# EAGLE board tutorial2 (EAGLE 7.6.0)

Size 73.58 x 63.39 mm. Coordinates in mm from the lower left corner, seen from the top.
Outline: 0,0 56.82,0 56.82,53.33 0,53.33 0,0
Copper layers (1*16): Top 0.035mm / dielectric 1.5mm / Bottom 0.035mm
Design rules "default": minimum track width 10mil, minimum drill 24mil, track to track 8mil, track to pad 8mil, pad to pad 8mil, via to via 8mil, smd to smd 8mil, copper to edge 40mil, drill to drill 8mil, minimum pad ring 10mil, minimum via ring 8mil, stop-mask expansion 4mil, vias tented up to drill 0mil, thermal gap 10mil

## Footprints (pad centres in the part's own frame; a part is rotated, then mirrored left to right if it is on the bottom)
HDSP-M = drill 0.813 long: 1 -5.08,-7.62; 2 -2.54,-7.62; 3 0,-7.62; 4 2.54,-7.62; 5 5.08,-7.62; 6 5.08,7.62; 7 2.54,7.62; 8 0,7.62; 9 -2.54,7.62; 10 -5.08,7.62
0207/10 = drill 0.813 octagon: 1 -5.08,0; 2 5.08,0
B25V = drill 0.813 long: A 2.54,0.635; E -2.54,0.635; S 0,0.635
TL1105 = drill 1 pad 1.676: 1 -2.25,3.25; 2 2.25,3.25; 3 -2.25,-3.25; 4 2.25,-3.25
TO92 = drill 0.813 octagon: 1 1.27,0; 2 0,1.905; 3 -1.27,0
ARDUINO_UNO = drill 1.016 pad 1.88: 0 63.5,50.8; 1 60.96,50.8; 2 58.42,50.8; 3 55.88,50.8; 3.3V 35.56,2.54; 4 53.34,50.8; 5 50.8,50.8; 5V 38.1,2.54; 6 48.26,50.8; 7 45.72,50.8; 8 41.656,50.8; 9 39.116,50.8; 10 36.576,50.8; 11 34.036,50.8; 12 31.496,50.8; 13 28.956,50.8; A0 50.8,2.54; A1 53.34,2.54; A2 55.88,2.54; A3 58.42,2.54; A4 60.96,2.54; A5 63.5,2.54; AREF 23.876,50.8; GND 26.416,50.8; GND. 43.18,2.54; GND.. 40.64,2.54; I/OREF 30.48,2.54; N/C 27.94,2.54; RESET 33.02,2.54; SCL 18.796,50.8; SDA 21.336,50.8; VIN 45.72,2.54 | hole 3.2: 66.04,7.62; 66.04,35.56; 15.24,50.8; 13.97,2.54

## Placement (x,y rotation side)
Digit7  [HDSP-M]  5,22.78 0 top
Digit8  [HDSP-M]  5,35.48 0 top
R1  150‎Ω  [0207/10]  5,149.78 0 top  (outside the outline)
R2  150‎Ω  [0207/10]  5,162.48 0 top  (outside the outline)
R3  150‎Ω  [0207/10]  5,175.18 0 top  (outside the outline)
R4  150‎Ω  [0207/10]  5,187.88 0 top  (outside the outline)
R5  150‎Ω  [0207/10]  5,200.58 0 top  (outside the outline)
R6  150‎Ω  [0207/10]  5,213.28 0 top  (outside the outline)
R7  150‎Ω  [0207/10]  5,48.18 0 top
R8  1000‎Ω  [0207/10]  5,60.88 0 top
R9  1000‎Ω  [0207/10]  5,73.58 0 top  (outside the outline)
R10  1k‎Ω  [0207/10]  5,276.78 0 top  (outside the outline)
R11  1k‎Ω  [0207/10]  5,264.08 0 top  (outside the outline)
R12  1k‎Ω  [0207/10]  5,251.38 0 top  (outside the outline)
Rpot1  250k‎Ω  [B25V]  5,86.28 0 top  (outside the outline)
Rpot2  250k‎Ω  [B25V]  5,98.98 0 top  (outside the outline)
S1  [TL1105]  5,111.68 0 top  (outside the outline)
S2  [TL1105]  5,124.38 0 top  (outside the outline)
S3  [TL1105]  5,137.08 0 top  (outside the outline)
T2  [TO92]  5,238.68 0 top  (outside the outline)
T3  [TO92]  5,225.98 0 top  (outside the outline)
U1  [ARDUINO_UNO]  5,10.08 0 top

## Library data of the parts
Digit7 Digit8 R1-R12 Rpot1 Rpot2 S1-S3 T2 T3 U1 = AUTODESK_CIRCUITS_BREADBOARD

## Nets
N$1: R6.1 U1.8
N$2: R5.1 U1.7
N$3: R4.1 U1.6
N$4: R3.1 U1.5
N$5: R2.1 U1.4
N$6: R1.1 U1.3
N$7: R7.1 U1.2
N$8: Digit7.4 Digit8.4 R7.2
N$9: Digit7.8
N$10: Digit7.5
N$11: Digit8.3 T3.3
N$12: Digit8.8
N$13: S1.4
N$14: S1.3
N$15: R12.1 S3.1 U1.13
N$16: R11.1 S1.1 U1.12
N$17: R10.1 S2.1 U1.11
N$18: Rpot2.S U1.A0
N$19: Rpot1.S U1.A1
N$20: Digit8.5
N$21: S2.4
N$22: S2.3
N$23: S3.4
N$24: S3.3
N$25: R9.2 T3.2
N$26: R8.1 U1.9
N$27: R8.2 T2.2
N$28: R9.1 U1.10
N$29: Rpot1.A Rpot2.A S1.2 S2.2 S3.2 U1.5V
N$30: Digit7.1 Digit8.1 R2.2
N$31: Digit7.2 Digit8.2 R1.2
N$32: Digit7.3 T2.3
N$33: Digit7.10 Digit8.10 R3.2
N$34: Digit7.9 Digit8.9 R4.2
N$35: Digit7.7 Digit8.7 R5.2
N$36: Digit7.6 Digit8.6 R6.2
N$37: R10.2 R11.2 R12.2 Rpot1.E Rpot2.E T2.1 T3.1 U1.GND..

## Tracks (layer width: path | path; a pad name or v marks a point on that pad's centre or on a via)
N$1  (1 unrouted)
N$2  (1 unrouted)
N$3  (1 unrouted)
N$4  (1 unrouted)
N$5  (1 unrouted)
N$6  (1 unrouted)
N$7  (1 unrouted)
N$8  (2 unrouted)
N$11  (1 unrouted)
N$15  (2 unrouted)
N$16  (2 unrouted)
N$17  (2 unrouted)
N$18  (1 unrouted)
N$19  (1 unrouted)
N$25  (1 unrouted)
N$26  (1 unrouted)
N$27  (1 unrouted)
N$28  (1 unrouted)
N$29  (5 unrouted)
N$30  (2 unrouted)
N$31  (2 unrouted)
N$32  (1 unrouted)
N$33  (2 unrouted)
N$34  (2 unrouted)
N$35  (2 unrouted)
N$36  (2 unrouted)
N$37  (7 unrouted)